# EAGLE board Si4703-Eval-Panel-v13 (EAGLE 6.6.0), part 1 of 2
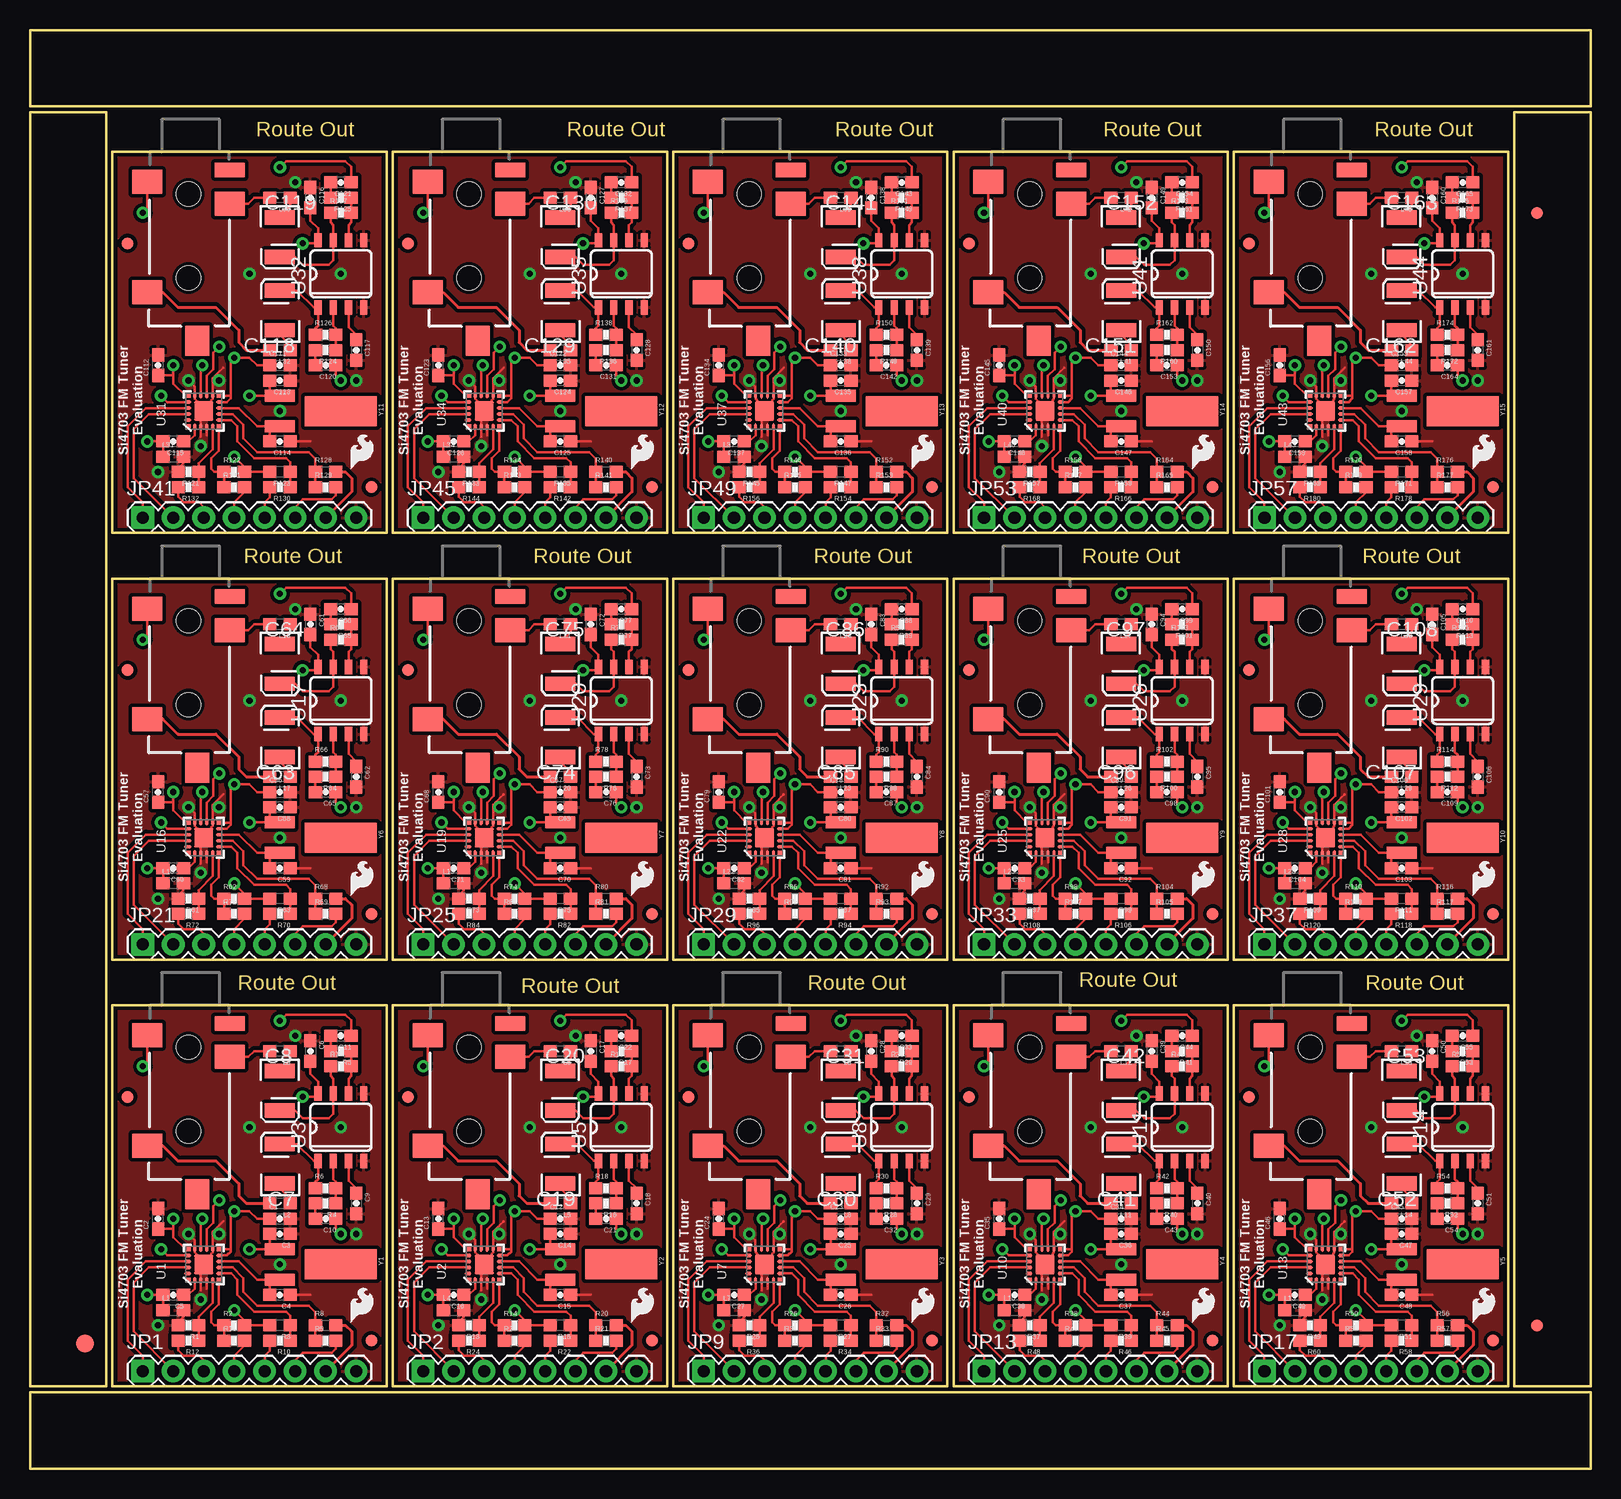
[diagram p0: board, top side]
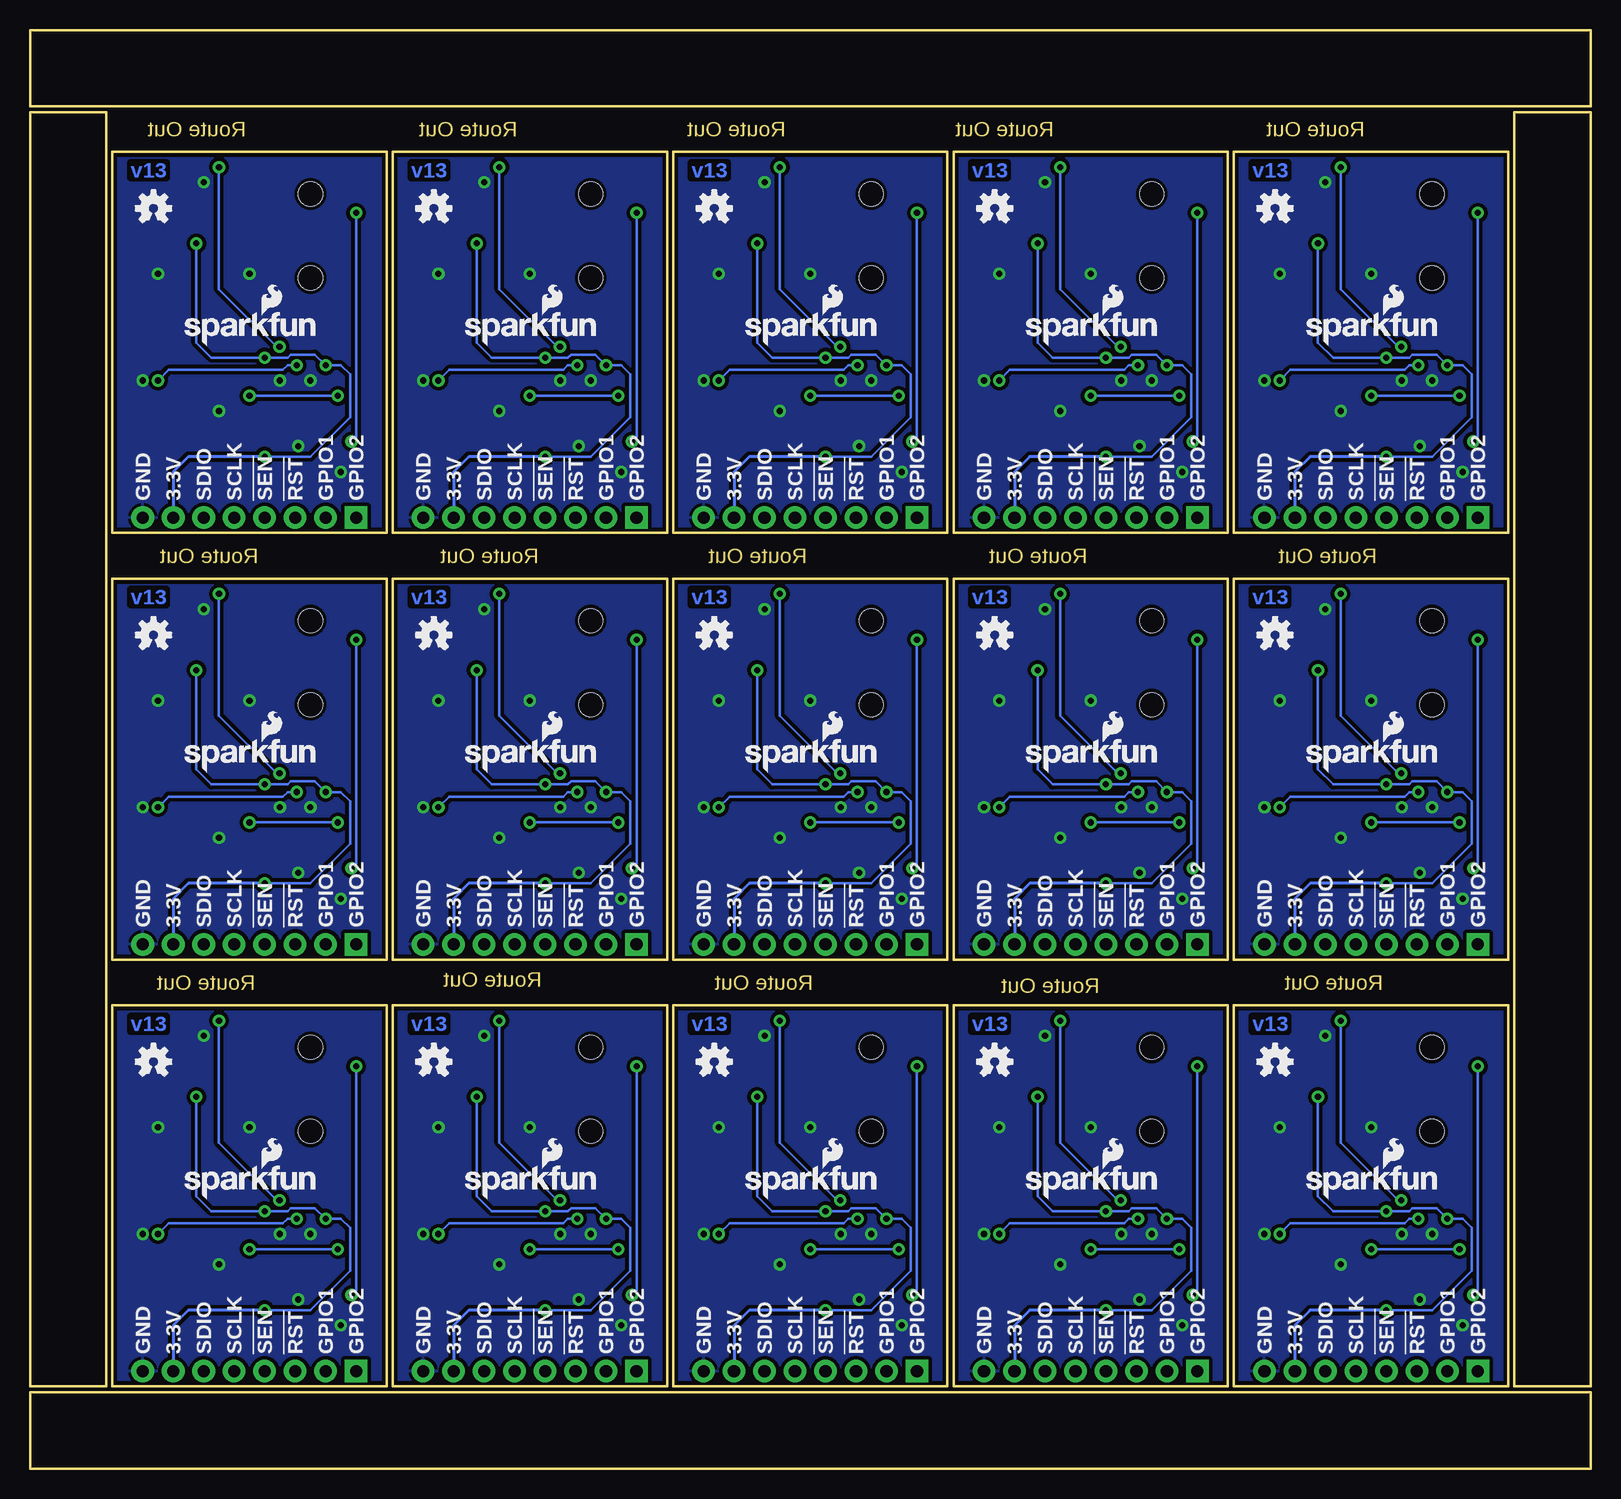
[diagram p1: board, bottom side, seen from below]

Size 130.05 x 119.89 mm. Coordinates in mm from the lower left corner, seen from the top.
Outline: 6.86,6.86 29.72,6.86 29.72,38.61 6.86,38.61 6.86,6.86
Outline: 30.23,6.86 53.09,6.86 53.09,38.61 30.23,38.61 30.23,6.86
Outline: 53.59,6.86 76.45,6.86 76.45,38.61 53.59,38.61 53.59,6.86
Outline: 76.96,6.86 99.82,6.86 99.82,38.61 76.96,38.61 76.96,6.86
Outline: 100.33,6.86 123.19,6.86 123.19,38.61 100.33,38.61 100.33,6.86
Outline: 6.86,42.42 29.72,42.42 29.72,74.17 6.86,74.17 6.86,42.42
Outline: 30.23,42.42 53.09,42.42 53.09,74.17 30.23,74.17 30.23,42.42
Outline: 53.59,42.42 76.45,42.42 76.45,74.17 53.59,74.17 53.59,42.42
Outline: 76.96,42.42 99.82,42.42 99.82,74.17 76.96,74.17 76.96,42.42
Outline: 100.33,42.42 123.19,42.42 123.19,74.17 100.33,74.17 100.33,42.42
Outline: 6.86,77.98 29.72,77.98 29.72,109.73 6.86,109.73 6.86,77.98
Outline: 30.23,77.98 53.09,77.98 53.09,109.73 30.23,109.73 30.23,77.98
Outline: 53.59,77.98 76.45,77.98 76.45,109.73 53.59,109.73 53.59,77.98
Outline: 76.96,77.98 99.82,77.98 99.82,109.73 76.96,109.73 76.96,77.98
Outline: 100.33,77.98 123.19,77.98 123.19,109.73 100.33,109.73 100.33,77.98
Outline: 6.35,6.86 6.35,113.03 0,113.03 0,6.86 6.35,6.86
Outline: 0,0 130.05,0 130.05,6.35 0,6.35 0,0
Outline: 130.05,6.86 130.05,113.03 123.7,113.03 123.7,6.86 130.05,6.86
Outline: 130.05,119.89 0,119.89 0,113.54 130.05,113.54 130.05,119.89
Copper layers (1*16): Top 0.035mm / dielectric 1.5mm / Bottom 0.035mm
Design rules "SparkFun *": minimum track width 8mil, minimum drill 20mil, track to track 8mil, track to pad 8mil, pad to pad 8mil, via to via 8mil, smd to smd 8mil, copper to edge 10mil, drill to drill 8mil, minimum pad ring 12mil, minimum via ring 10mil, stop-mask expansion 4mil, vias tented up to drill 20mil, thermal gap 10mil

## Footprints (pad centres in the part's own frame; a part is rotated, then mirrored left to right if it is on the bottom)
0603-CAP = smd 1.1 x 1: 1 -0.85,0; 2 0.85,0
EIA3528 = smd 1.2 x 2.5: A 1.65,0; C -1.65,0
FIDUCIAL-1.5X3 = smd 1.5 x 1.5: 1 0,0
FIDUCIAL-1X2 = smd 1 x 1: 1 0,0
1X08 = drill 1.016 pad 1.88 square: 1 0,0 | drill 1.016 pad 1.88: 2 2.54,0; 3 5.08,0; 4 7.62,0; 5 10.16,0; 6 12.7,0; 7 15.24,0; 8 17.78,0
0603 = smd 1.1 x 1: 1 -0.85,0; 2 0.85,0
0603-RES = smd 1.1 x 1: 1 -0.85,0; 2 0.85,0
SI470X = smd 0.34 x 0.34: 1 -1.275,1.265; 6 -1.265,-1.265; 11 1.265,-1.265; 16 1.265,1.265 | smd 0.61 x 0.28: 2 -1.335,0.75; 3 -1.335,0.25; 4 -1.335,-0.25; 5 -1.335,-0.75; 12 1.335,-0.75; 13 1.335,-0.25; 14 1.335,0.25; 15 1.335,0.75 | smd 0.28 x 0.61: 7 -0.75,-1.335; 8 -0.25,-1.335; 9 0.25,-1.335; 10 0.75,-1.335; 17 0.75,1.335; 18 0.25,1.335; 19 -0.25,1.335; 20 -0.75,1.335 | smd 1.6 x 1.6: 21 0,0
SO08-TIGHT = smd 0.6 x 1.2: 1 -1.905,-2.8; 2 -0.635,-2.8; 3 0.635,-2.8; 4 1.905,-2.8; 5 1.905,2.8; 6 0.635,2.8; 7 -0.635,2.8; 8 -1.905,2.8
AUDIO-JACK-3.5MM-SMD = smd 2 x 2.5: RING 4.3,3.45; SLEEVE 2.5,-3.45; TIP 11.7,-3.45 | smd 1.2 x 2.5: RSH 1.5,3.45 | smd 2.5 x 2: TSH 15.75,0.75 | hole 2: 3.5,0; 10.5,0
CRYSTAL-32KHZ-SMD = smd 2.5 x 6: SHEILD 0,5.08 | smd 1 x 2.5: X1 -1.27,0; X2 1.27,0

## Placement (x,y rotation side)
C1  0.1uF  [0603-CAP]  20.83,20.83 0 top
C2  22nF  [0603-CAP]  10.67,20.83 90 top
C3  22pF  [0603-CAP]  20.83,19.56 180 top
C4  22pF  [0603-CAP]  20.83,14.48 180 top
C5  1nF  [0603-CAP]  11.94,14.48 180 top
C6  0.1uF  [0603-CAP]  23.37,34.8 270 top
C7  47uF  [EIA3528]  20.83,25.4 90 top
C8  47uF  [EIA3528]  20.83,31.5 270 top
C9  0.1uF  [0603-CAP]  27.18,22.1 270 top
C10  1uF  [0603-CAP]  24.64,20.83 180 top
C11  1uF  [0603-CAP]  25.91,36.07 180 top
C12  0.1uF  [0603-CAP]  44.2,20.83 0 top
C13  22nF  [0603-CAP]  34.04,20.83 90 top
C14  22pF  [0603-CAP]  44.2,19.56 180 top
C15  22pF  [0603-CAP]  44.2,14.48 180 top
C16  1nF  [0603-CAP]  35.31,14.48 180 top
C17  0.1uF  [0603-CAP]  46.74,34.8 270 top
C18  0.1uF  [0603-CAP]  50.55,22.1 270 top
C19  47uF  [EIA3528]  44.2,25.4 90 top
C20  47uF  [EIA3528]  44.2,31.5 270 top
C21  1uF  [0603-CAP]  48.01,20.83 180 top
C22  1uF  [0603-CAP]  49.28,36.07 180 top
C23  0.1uF  [0603-CAP]  67.56,20.83 0 top
C24  22nF  [0603-CAP]  57.4,20.83 90 top
C25  22pF  [0603-CAP]  67.56,19.56 180 top
C26  22pF  [0603-CAP]  67.56,14.48 180 top
C27  1nF  [0603-CAP]  58.67,14.48 180 top
C28  0.1uF  [0603-CAP]  70.1,34.8 270 top
C29  0.1uF  [0603-CAP]  73.91,22.1 270 top
C30  47uF  [EIA3528]  67.56,25.4 90 top
C31  47uF  [EIA3528]  67.56,31.5 270 top
C32  1uF  [0603-CAP]  71.37,20.83 180 top
C33  1uF  [0603-CAP]  72.64,36.07 180 top
C34  0.1uF  [0603-CAP]  90.93,20.83 0 top
C35  22nF  [0603-CAP]  80.77,20.83 90 top
C36  22pF  [0603-CAP]  90.93,19.56 180 top
C37  22pF  [0603-CAP]  90.93,14.48 180 top
C38  1nF  [0603-CAP]  82.04,14.48 180 top
C39  0.1uF  [0603-CAP]  93.47,34.8 270 top
C40  0.1uF  [0603-CAP]  97.28,22.1 270 top
C41  47uF  [EIA3528]  90.93,25.4 90 top
C42  47uF  [EIA3528]  90.93,31.5 270 top
C43  1uF  [0603-CAP]  94.74,20.83 180 top
C44  1uF  [0603-CAP]  96.01,36.07 180 top
C45  0.1uF  [0603-CAP]  114.3,20.83 0 top
C46  22nF  [0603-CAP]  104.14,20.83 90 top
C47  22pF  [0603-CAP]  114.3,19.56 180 top
C48  22pF  [0603-CAP]  114.3,14.48 180 top
C49  1nF  [0603-CAP]  105.41,14.48 180 top
C50  0.1uF  [0603-CAP]  116.84,34.8 270 top
C51  0.1uF  [0603-CAP]  120.65,22.1 270 top
C52  47uF  [EIA3528]  114.3,25.4 90 top
C53  47uF  [EIA3528]  114.3,31.5 270 top
C54  1uF  [0603-CAP]  118.11,20.83 180 top
C55  1uF  [0603-CAP]  119.38,36.07 180 top
C56  0.1uF  [0603-CAP]  20.83,56.39 0 top
C57  22nF  [0603-CAP]  10.67,56.39 90 top
C58  22pF  [0603-CAP]  20.83,55.12 180 top
C59  22pF  [0603-CAP]  20.83,50.04 180 top
C60  1nF  [0603-CAP]  11.94,50.04 180 top
C61  0.1uF  [0603-CAP]  23.37,70.36 270 top
C62  0.1uF  [0603-CAP]  27.18,57.66 270 top
C63  47uF  [EIA3528]  20.83,60.96 90 top
C64  47uF  [EIA3528]  20.83,67.06 270 top
C65  1uF  [0603-CAP]  24.64,56.39 180 top
C66  1uF  [0603-CAP]  25.91,71.63 180 top
C67  0.1uF  [0603-CAP]  44.2,56.39 0 top
C68  22nF  [0603-CAP]  34.04,56.39 90 top
C69  22pF  [0603-CAP]  44.2,55.12 180 top
C70  22pF  [0603-CAP]  44.2,50.04 180 top
C71  1nF  [0603-CAP]  35.31,50.04 180 top
C72  0.1uF  [0603-CAP]  46.74,70.36 270 top
C73  0.1uF  [0603-CAP]  50.55,57.66 270 top
C74  47uF  [EIA3528]  44.2,60.96 90 top
C75  47uF  [EIA3528]  44.2,67.06 270 top
C76  1uF  [0603-CAP]  48.01,56.39 180 top
C77  1uF  [0603-CAP]  49.28,71.63 180 top
C78  0.1uF  [0603-CAP]  67.56,56.39 0 top
C79  22nF  [0603-CAP]  57.4,56.39 90 top
C80  22pF  [0603-CAP]  67.56,55.12 180 top
C81  22pF  [0603-CAP]  67.56,50.04 180 top
C82  1nF  [0603-CAP]  58.67,50.04 180 top
C83  0.1uF  [0603-CAP]  70.1,70.36 270 top
C84  0.1uF  [0603-CAP]  73.91,57.66 270 top
C85  47uF  [EIA3528]  67.56,60.96 90 top
C86  47uF  [EIA3528]  67.56,67.06 270 top
C87  1uF  [0603-CAP]  71.37,56.39 180 top
C88  1uF  [0603-CAP]  72.64,71.63 180 top
C89  0.1uF  [0603-CAP]  90.93,56.39 0 top
C90  22nF  [0603-CAP]  80.77,56.39 90 top
C91  22pF  [0603-CAP]  90.93,55.12 180 top
C92  22pF  [0603-CAP]  90.93,50.04 180 top
C93  1nF  [0603-CAP]  82.04,50.04 180 top
C94  0.1uF  [0603-CAP]  93.47,70.36 270 top
C95  0.1uF  [0603-CAP]  97.28,57.66 270 top
C96  47uF  [EIA3528]  90.93,60.96 90 top
C97  47uF  [EIA3528]  90.93,67.06 270 top
C98  1uF  [0603-CAP]  94.74,56.39 180 top
C99  1uF  [0603-CAP]  96.01,71.63 180 top
C100  0.1uF  [0603-CAP]  114.3,56.39 0 top
C101  22nF  [0603-CAP]  104.14,56.39 90 top
C102  22pF  [0603-CAP]  114.3,55.12 180 top
C103  22pF  [0603-CAP]  114.3,50.04 180 top
C104  1nF  [0603-CAP]  105.41,50.04 180 top
C105  0.1uF  [0603-CAP]  116.84,70.36 270 top
C106  0.1uF  [0603-CAP]  120.65,57.66 270 top
C107  47uF  [EIA3528]  114.3,60.96 90 top
C108  47uF  [EIA3528]  114.3,67.06 270 top
C109  1uF  [0603-CAP]  118.11,56.39 180 top
C110  1uF  [0603-CAP]  119.38,71.63 180 top
C111  0.1uF  [0603-CAP]  20.83,91.95 0 top
C112  22nF  [0603-CAP]  10.67,91.95 90 top
C113  22pF  [0603-CAP]  20.83,90.68 180 top
C114  22pF  [0603-CAP]  20.83,85.6 180 top
C115  1nF  [0603-CAP]  11.94,85.6 180 top
C116  0.1uF  [0603-CAP]  23.37,105.92 270 top
C117  0.1uF  [0603-CAP]  27.18,93.22 270 top
C118  47uF  [EIA3528]  20.83,96.52 90 top
C119  47uF  [EIA3528]  20.83,102.62 270 top
C120  1uF  [0603-CAP]  24.64,91.95 180 top
C121  1uF  [0603-CAP]  25.91,107.19 180 top
C122  0.1uF  [0603-CAP]  44.2,91.95 0 top
C123  22nF  [0603-CAP]  34.04,91.95 90 top
C124  22pF  [0603-CAP]  44.2,90.68 180 top
C125  22pF  [0603-CAP]  44.2,85.6 180 top
C126  1nF  [0603-CAP]  35.31,85.6 180 top
C127  0.1uF  [0603-CAP]  46.74,105.92 270 top
C128  0.1uF  [0603-CAP]  50.55,93.22 270 top
C129  47uF  [EIA3528]  44.2,96.52 90 top
C130  47uF  [EIA3528]  44.2,102.62 270 top
C131  1uF  [0603-CAP]  48.01,91.95 180 top
C132  1uF  [0603-CAP]  49.28,107.19 180 top
C133  0.1uF  [0603-CAP]  67.56,91.95 0 top
C134  22nF  [0603-CAP]  57.4,91.95 90 top
C135  22pF  [0603-CAP]  67.56,90.68 180 top
C136  22pF  [0603-CAP]  67.56,85.6 180 top
C137  1nF  [0603-CAP]  58.67,85.6 180 top
C138  0.1uF  [0603-CAP]  70.1,105.92 270 top
C139  0.1uF  [0603-CAP]  73.91,93.22 270 top
C140  47uF  [EIA3528]  67.56,96.52 90 top
C141  47uF  [EIA3528]  67.56,102.62 270 top
C142  1uF  [0603-CAP]  71.37,91.95 180 top
C143  1uF  [0603-CAP]  72.64,107.19 180 top
C144  0.1uF  [0603-CAP]  90.93,91.95 0 top
C145  22nF  [0603-CAP]  80.77,91.95 90 top
C146  22pF  [0603-CAP]  90.93,90.68 180 top
C147  22pF  [0603-CAP]  90.93,85.6 180 top
C148  1nF  [0603-CAP]  82.04,85.6 180 top
C149  0.1uF  [0603-CAP]  93.47,105.92 270 top
C150  0.1uF  [0603-CAP]  97.28,93.22 270 top
C151  47uF  [EIA3528]  90.93,96.52 90 top
C152  47uF  [EIA3528]  90.93,102.62 270 top
C153  1uF  [0603-CAP]  94.74,91.95 180 top
C154  1uF  [0603-CAP]  96.01,107.19 180 top
C155  0.1uF  [0603-CAP]  114.3,91.95 0 top
C156  22nF  [0603-CAP]  104.14,91.95 90 top
C157  22pF  [0603-CAP]  114.3,90.68 180 top
C158  22pF  [0603-CAP]  114.3,85.6 180 top
C159  1nF  [0603-CAP]  105.41,85.6 180 top
C160  0.1uF  [0603-CAP]  116.84,105.92 270 top
C161  0.1uF  [0603-CAP]  120.65,93.22 270 top
C162  47uF  [EIA3528]  114.3,96.52 90 top
C163  47uF  [EIA3528]  114.3,102.62 270 top
C164  1uF  [0603-CAP]  118.11,91.95 180 top
C165  1uF  [0603-CAP]  119.38,107.19 180 top
E$1  [FIDUCIAL-1.5X3]  4.57,10.41 0 top
E$4  [FIDUCIAL-1X2]  125.6,11.94 0 top
E$5  [FIDUCIAL-1X2]  125.6,104.65 180 top
JP1  [1X08]  9.4,8.13 0 top
JP2  [1X08]  32.77,8.13 0 top
JP3  LOGO-SFESK  [SFE-LOGO-FLAME]  26.75,12.21 0 top
JP4  FIDUCIAL1X2  [FIDUCIAL-1X2]  28.45,10.67 0 top
JP5  FIDUCIAL1X2  [FIDUCIAL-1X2]  8.13,30.99 0 top
JP6  LOGO-SFESK  [SFE-LOGO-FLAME]  50.12,12.21 0 top
JP7  FIDUCIAL1X2  [FIDUCIAL-1X2]  51.82,10.67 0 top
JP8  FIDUCIAL1X2  [FIDUCIAL-1X2]  31.5,30.99 0 top
JP9  [1X08]  56.13,8.13 0 top
JP10  LOGO-SFESK  [SFE-LOGO-FLAME]  73.48,12.21 0 top
JP11  FIDUCIAL1X2  [FIDUCIAL-1X2]  75.18,10.67 0 top
JP12  FIDUCIAL1X2  [FIDUCIAL-1X2]  54.86,30.99 0 top
JP13  [1X08]  79.5,8.13 0 top
JP14  LOGO-SFESK  [SFE-LOGO-FLAME]  96.85,12.21 0 top
JP15  FIDUCIAL1X2  [FIDUCIAL-1X2]  98.55,10.67 0 top
JP16  FIDUCIAL1X2  [FIDUCIAL-1X2]  78.23,30.99 0 top
JP17  [1X08]  102.87,8.13 0 top
JP18  LOGO-SFESK  [SFE-LOGO-FLAME]  120.22,12.21 0 top
JP19  FIDUCIAL1X2  [FIDUCIAL-1X2]  121.92,10.67 0 top
JP20  FIDUCIAL1X2  [FIDUCIAL-1X2]  101.6,30.99 0 top
JP21  [1X08]  9.4,43.69 0 top
JP22  LOGO-SFESK  [SFE-LOGO-FLAME]  26.75,47.77 0 top
JP23  FIDUCIAL1X2  [FIDUCIAL-1X2]  28.45,46.23 0 top
JP24  FIDUCIAL1X2  [FIDUCIAL-1X2]  8.13,66.55 0 top
JP25  [1X08]  32.77,43.69 0 top
JP26  LOGO-SFESK  [SFE-LOGO-FLAME]  50.12,47.77 0 top
JP27  FIDUCIAL1X2  [FIDUCIAL-1X2]  51.82,46.23 0 top
JP28  FIDUCIAL1X2  [FIDUCIAL-1X2]  31.5,66.55 0 top
JP29  [1X08]  56.13,43.69 0 top
JP30  LOGO-SFESK  [SFE-LOGO-FLAME]  73.48,47.77 0 top
JP31  FIDUCIAL1X2  [FIDUCIAL-1X2]  75.18,46.23 0 top
JP32  FIDUCIAL1X2  [FIDUCIAL-1X2]  54.86,66.55 0 top
JP33  [1X08]  79.5,43.69 0 top
JP34  LOGO-SFESK  [SFE-LOGO-FLAME]  96.85,47.77 0 top
JP35  FIDUCIAL1X2  [FIDUCIAL-1X2]  98.55,46.23 0 top
JP36  FIDUCIAL1X2  [FIDUCIAL-1X2]  78.23,66.55 0 top
JP37  [1X08]  102.87,43.69 0 top
JP38  LOGO-SFESK  [SFE-LOGO-FLAME]  120.22,47.77 0 top
JP39  FIDUCIAL1X2  [FIDUCIAL-1X2]  121.92,46.23 0 top
JP40  FIDUCIAL1X2  [FIDUCIAL-1X2]  101.6,66.55 0 top
JP41  [1X08]  9.4,79.25 0 top
JP42  LOGO-SFESK  [SFE-LOGO-FLAME]  26.75,83.33 0 top
JP43  FIDUCIAL1X2  [FIDUCIAL-1X2]  28.45,81.79 0 top
JP44  FIDUCIAL1X2  [FIDUCIAL-1X2]  8.13,102.11 0 top
JP45  [1X08]  32.77,79.25 0 top
JP46  LOGO-SFESK  [SFE-LOGO-FLAME]  50.12,83.33 0 top
JP47  FIDUCIAL1X2  [FIDUCIAL-1X2]  51.82,81.79 0 top
JP48  FIDUCIAL1X2  [FIDUCIAL-1X2]  31.5,102.11 0 top
JP49  [1X08]  56.13,79.25 0 top
JP50  LOGO-SFESK  [SFE-LOGO-FLAME]  73.48,83.33 0 top
JP51  FIDUCIAL1X2  [FIDUCIAL-1X2]  75.18,81.79 0 top
JP52  FIDUCIAL1X2  [FIDUCIAL-1X2]  54.86,102.11 0 top
JP53  [1X08]  79.5,79.25 0 top
JP54  LOGO-SFESK  [SFE-LOGO-FLAME]  96.85,83.33 0 top
JP55  FIDUCIAL1X2  [FIDUCIAL-1X2]  98.55,81.79 0 top
JP56  FIDUCIAL1X2  [FIDUCIAL-1X2]  78.23,102.11 0 top
JP57  [1X08]  102.87,79.25 0 top
JP58  LOGO-SFESK  [SFE-LOGO-FLAME]  120.22,83.33 0 top
JP59  FIDUCIAL1X2  [FIDUCIAL-1X2]  121.92,81.79 0 top
JP60  FIDUCIAL1X2  [FIDUCIAL-1X2]  101.6,102.11 0 top
L1  270nH  [0603]  11.94,13.21 0 top
L2  Ferrite 2.5k  [0603]  20.83,22.1 180 top
L3  Ferrite 2.5k  [0603]  20.83,34.8 180 top
L4  270nH  [0603]  35.31,13.21 0 top
L5  Ferrite 2.5k  [0603]  44.2,22.1 180 top
L6  Ferrite 2.5k  [0603]  44.2,34.8 180 top
L7  270nH  [0603]  58.67,13.21 0 top
L8  Ferrite 2.5k  [0603]  67.56,22.1 180 top
L9  Ferrite 2.5k  [0603]  67.56,34.8 180 top
L10  270nH  [0603]  82.04,13.21 0 top
L11  Ferrite 2.5k  [0603]  90.93,22.1 180 top
L12  Ferrite 2.5k  [0603]  90.93,34.8 180 top
L13  270nH  [0603]  105.41,13.21 0 top
L14  Ferrite 2.5k  [0603]  114.3,22.1 180 top
L15  Ferrite 2.5k  [0603]  114.3,34.8 180 top
L16  270nH  [0603]  11.94,48.77 0 top
L17  Ferrite 2.5k  [0603]  20.83,57.66 180 top
L18  Ferrite 2.5k  [0603]  20.83,70.36 180 top
L19  270nH  [0603]  35.31,48.77 0 top
L20  Ferrite 2.5k  [0603]  44.2,57.66 180 top
L21  Ferrite 2.5k  [0603]  44.2,70.36 180 top
L22  270nH  [0603]  58.67,48.77 0 top
L23  Ferrite 2.5k  [0603]  67.56,57.66 180 top
L24  Ferrite 2.5k  [0603]  67.56,70.36 180 top
L25  270nH  [0603]  82.04,48.77 0 top
L26  Ferrite 2.5k  [0603]  90.93,57.66 180 top
L27  Ferrite 2.5k  [0603]  90.93,70.36 180 top
L28  270nH  [0603]  105.41,48.77 0 top
L29  Ferrite 2.5k  [0603]  114.3,57.66 180 top
L30  Ferrite 2.5k  [0603]  114.3,70.36 180 top
L31  270nH  [0603]  11.94,84.33 0 top
L32  Ferrite 2.5k  [0603]  20.83,93.22 180 top
L33  Ferrite 2.5k  [0603]  20.83,105.92 180 top
L34  270nH  [0603]  35.31,84.33 0 top
L35  Ferrite 2.5k  [0603]  44.2,93.22 180 top
L36  Ferrite 2.5k  [0603]  44.2,105.92 180 top
L37  270nH  [0603]  58.67,84.33 0 top
L38  Ferrite 2.5k  [0603]  67.56,93.22 180 top
L39  Ferrite 2.5k  [0603]  67.56,105.92 180 top
L40  270nH  [0603]  82.04,84.33 0 top
L41  Ferrite 2.5k  [0603]  90.93,93.22 180 top
L42  Ferrite 2.5k  [0603]  90.93,105.92 180 top
L43  270nH  [0603]  105.41,84.33 0 top
L44  Ferrite 2.5k  [0603]  114.3,93.22 180 top
L45  Ferrite 2.5k  [0603]  114.3,105.92 180 top
LOGO1  SFE_LOGO_NAME_FLAME.1_INCH  [SFE_LOGO_NAME_FLAME_.1]  24.13,22.35 0 bottom
LOGO2  OSHW-LOGOS  [OSHW-LOGO-S]  26.29,33.91 0 bottom
LOGO3  SFE_LOGO_NAME_FLAME.1_INCH  [SFE_LOGO_NAME_FLAME_.1]  47.5,22.35 0 bottom
LOGO4  OSHW-LOGOS  [OSHW-LOGO-S]  49.66,33.91 0 bottom
LOGO5  SFE_LOGO_NAME_FLAME.1_INCH  [SFE_LOGO_NAME_FLAME_.1]  70.87,22.35 0 bottom
LOGO6  OSHW-LOGOS  [OSHW-LOGO-S]  73.03,33.91 0 bottom
LOGO7  SFE_LOGO_NAME_FLAME.1_INCH  [SFE_LOGO_NAME_FLAME_.1]  94.23,22.35 0 bottom
LOGO8  OSHW-LOGOS  [OSHW-LOGO-S]  96.39,33.91 0 bottom
LOGO9  SFE_LOGO_NAME_FLAME.1_INCH  [SFE_LOGO_NAME_FLAME_.1]  117.6,22.35 0 bottom
LOGO10  OSHW-LOGOS  [OSHW-LOGO-S]  119.76,33.91 0 bottom
LOGO11  SFE_LOGO_NAME_FLAME.1_INCH  [SFE_LOGO_NAME_FLAME_.1]  24.13,57.91 0 bottom
LOGO12  OSHW-LOGOS  [OSHW-LOGO-S]  26.29,69.47 0 bottom
LOGO13  SFE_LOGO_NAME_FLAME.1_INCH  [SFE_LOGO_NAME_FLAME_.1]  47.5,57.91 0 bottom
LOGO14  OSHW-LOGOS  [OSHW-LOGO-S]  49.66,69.47 0 bottom
LOGO15  SFE_LOGO_NAME_FLAME.1_INCH  [SFE_LOGO_NAME_FLAME_.1]  70.87,57.91 0 bottom
LOGO16  OSHW-LOGOS  [OSHW-LOGO-S]  73.03,69.47 0 bottom
LOGO17  SFE_LOGO_NAME_FLAME.1_INCH  [SFE_LOGO_NAME_FLAME_.1]  94.23,57.91 0 bottom
LOGO18  OSHW-LOGOS  [OSHW-LOGO-S]  96.39,69.47 0 bottom
LOGO19  SFE_LOGO_NAME_FLAME.1_INCH  [SFE_LOGO_NAME_FLAME_.1]  117.6,57.91 0 bottom
LOGO20  OSHW-LOGOS  [OSHW-LOGO-S]  119.76,69.47 0 bottom
LOGO21  SFE_LOGO_NAME_FLAME.1_INCH  [SFE_LOGO_NAME_FLAME_.1]  24.13,93.47 0 bottom
LOGO22  OSHW-LOGOS  [OSHW-LOGO-S]  26.29,105.03 0 bottom
LOGO23  SFE_LOGO_NAME_FLAME.1_INCH  [SFE_LOGO_NAME_FLAME_.1]  47.5,93.47 0 bottom
LOGO24  OSHW-LOGOS  [OSHW-LOGO-S]  49.66,105.03 0 bottom
LOGO25  SFE_LOGO_NAME_FLAME.1_INCH  [SFE_LOGO_NAME_FLAME_.1]  70.87,93.47 0 bottom
LOGO26  OSHW-LOGOS  [OSHW-LOGO-S]  73.03,105.03 0 bottom
LOGO27  SFE_LOGO_NAME_FLAME.1_INCH  [SFE_LOGO_NAME_FLAME_.1]  94.23,93.47 0 bottom
LOGO28  OSHW-LOGOS  [OSHW-LOGO-S]  96.39,105.03 0 bottom
LOGO29  SFE_LOGO_NAME_FLAME.1_INCH  [SFE_LOGO_NAME_FLAME_.1]  117.6,93.47 0 bottom
LOGO30  OSHW-LOGOS  [OSHW-LOGO-S]  119.76,105.03 0 bottom
R1  10k  [0603-RES]  13.21,11.94 180 top
R2  10k  [0603-RES]  17.02,11.94 0 top
R3  4.7k  [0603]  20.83,11.94 180 top
R4  20k  [0603-RES]  24.64,22.1 180 top
R5  20k  [0603-RES]  25.91,34.8 180 top
R6  20k  [0603-RES]  24.64,23.37 0 top
R7  20k  [0603-RES]  25.91,33.53 0 top
R8  4.7k  [0603]  24.64,11.94 0 top
R9  330  [0603-RES]  24.64,10.67 0 top
R10  330  [0603-RES]  20.83,10.67 180 top
R11  330  [0603-RES]  17.02,10.67 0 top
R12  330  [0603-RES]  13.21,10.67 180 top
R13  10k  [0603-RES]  36.58,11.94 180 top
R14  10k  [0603-RES]  40.39,11.94 0 top
R15  4.7k  [0603]  44.2,11.94 180 top
R16  20k  [0603-RES]  48.01,22.1 180 top
R17  20k  [0603-RES]  49.28,34.8 180 top
R18  20k  [0603-RES]  48.01,23.37 0 top
R19  20k  [0603-RES]  49.28,33.53 0 top
R20  4.7k  [0603]  48.01,11.94 0 top
R21  330  [0603-RES]  48.01,10.67 0 top
R22  330  [0603-RES]  44.2,10.67 180 top
R23  330  [0603-RES]  40.39,10.67 0 top
R24  330  [0603-RES]  36.58,10.67 180 top
R25  10k  [0603-RES]  59.94,11.94 180 top
R26  10k  [0603-RES]  63.75,11.94 0 top
R27  4.7k  [0603]  67.56,11.94 180 top
R28  20k  [0603-RES]  71.37,22.1 180 top
R29  20k  [0603-RES]  72.64,34.8 180 top
R30  20k  [0603-RES]  71.37,23.37 0 top
R31  20k  [0603-RES]  72.64,33.53 0 top
R32  4.7k  [0603]  71.37,11.94 0 top
R33  330  [0603-RES]  71.37,10.67 0 top
R34  330  [0603-RES]  67.56,10.67 180 top
R35  330  [0603-RES]  63.75,10.67 0 top
R36  330  [0603-RES]  59.94,10.67 180 top
R37  10k  [0603-RES]  83.31,11.94 180 top
R38  10k  [0603-RES]  87.12,11.94 0 top
R39  4.7k  [0603]  90.93,11.94 180 top
R40  20k  [0603-RES]  94.74,22.1 180 top
R41  20k  [0603-RES]  96.01,34.8 180 top
R42  20k  [0603-RES]  94.74,23.37 0 top
R43  20k  [0603-RES]  96.01,33.53 0 top
R44  4.7k  [0603]  94.74,11.94 0 top
R45  330  [0603-RES]  94.74,10.67 0 top
R46  330  [0603-RES]  90.93,10.67 180 top
R47  330  [0603-RES]  87.12,10.67 0 top
R48  330  [0603-RES]  83.31,10.67 180 top
R49  10k  [0603-RES]  106.68,11.94 180 top
R50  10k  [0603-RES]  110.49,11.94 0 top
R51  4.7k  [0603]  114.3,11.94 180 top
R52  20k  [0603-RES]  118.11,22.1 180 top
R53  20k  [0603-RES]  119.38,34.8 180 top
R54  20k  [0603-RES]  118.11,23.37 0 top
R55  20k  [0603-RES]  119.38,33.53 0 top
R56  4.7k  [0603]  118.11,11.94 0 top
R57  330  [0603-RES]  118.11,10.67 0 top
R58  330  [0603-RES]  114.3,10.67 180 top
R59  330  [0603-RES]  110.49,10.67 0 top
R60  330  [0603-RES]  106.68,10.67 180 top
R61  10k  [0603-RES]  13.21,47.5 180 top
R62  10k  [0603-RES]  17.02,47.5 0 top
R63  4.7k  [0603]  20.83,47.5 180 top
R64  20k  [0603-RES]  24.64,57.66 180 top
R65  20k  [0603-RES]  25.91,70.36 180 top
R66  20k  [0603-RES]  24.64,58.93 0 top
R67  20k  [0603-RES]  25.91,69.09 0 top
R68  4.7k  [0603]  24.64,47.5 0 top
R69  330  [0603-RES]  24.64,46.23 0 top
R70  330  [0603-RES]  20.83,46.23 180 top
R71  330  [0603-RES]  17.02,46.23 0 top
R72  330  [0603-RES]  13.21,46.23 180 top
R73  10k  [0603-RES]  36.58,47.5 180 top
R74  10k  [0603-RES]  40.39,47.5 0 top
R75  4.7k  [0603]  44.2,47.5 180 top
R76  20k  [0603-RES]  48.01,57.66 180 top
R77  20k  [0603-RES]  49.28,70.36 180 top
R78  20k  [0603-RES]  48.01,58.93 0 top
R79  20k  [0603-RES]  49.28,69.09 0 top
R80  4.7k  [0603]  48.01,47.5 0 top
R81  330  [0603-RES]  48.01,46.23 0 top
R82  330  [0603-RES]  44.2,46.23 180 top
R83  330  [0603-RES]  40.39,46.23 0 top
R84  330  [0603-RES]  36.58,46.23 180 top
R85  10k  [0603-RES]  59.94,47.5 180 top
R86  10k  [0603-RES]  63.75,47.5 0 top
R87  4.7k  [0603]  67.56,47.5 180 top
R88  20k  [0603-RES]  71.37,57.66 180 top
R89  20k  [0603-RES]  72.64,70.36 180 top
R90  20k  [0603-RES]  71.37,58.93 0 top
R91  20k  [0603-RES]  72.64,69.09 0 top
R92  4.7k  [0603]  71.37,47.5 0 top
R93  330  [0603-RES]  71.37,46.23 0 top
R94  330  [0603-RES]  67.56,46.23 180 top
R95  330  [0603-RES]  63.75,46.23 0 top
R96  330  [0603-RES]  59.94,46.23 180 top
R97  10k  [0603-RES]  83.31,47.5 180 top
R98  10k  [0603-RES]  87.12,47.5 0 top
R99  4.7k  [0603]  90.93,47.5 180 top
R100  20k  [0603-RES]  94.74,57.66 180 top
R101  20k  [0603-RES]  96.01,70.36 180 top
R102  20k  [0603-RES]  94.74,58.93 0 top
R103  20k  [0603-RES]  96.01,69.09 0 top
R104  4.7k  [0603]  94.74,47.5 0 top
R105  330  [0603-RES]  94.74,46.23 0 top
R106  330  [0603-RES]  90.93,46.23 180 top
R107  330  [0603-RES]  87.12,46.23 0 top
R108  330  [0603-RES]  83.31,46.23 180 top
R109  10k  [0603-RES]  106.68,47.5 180 top
R110  10k  [0603-RES]  110.49,47.5 0 top
R111  4.7k  [0603]  114.3,47.5 180 top
R112  20k  [0603-RES]  118.11,57.66 180 top
R113  20k  [0603-RES]  119.38,70.36 180 top
R114  20k  [0603-RES]  118.11,58.93 0 top
R115  20k  [0603-RES]  119.38,69.09 0 top
R116  4.7k  [0603]  118.11,47.5 0 top
R117  330  [0603-RES]  118.11,46.23 0 top
R118  330  [0603-RES]  114.3,46.23 180 top
R119  330  [0603-RES]  110.49,46.23 0 top
R120  330  [0603-RES]  106.68,46.23 180 top
R121  10k  [0603-RES]  13.21,83.06 180 top
R122  10k  [0603-RES]  17.02,83.06 0 top
R123  4.7k  [0603]  20.83,83.06 180 top
R124  20k  [0603-RES]  24.64,93.22 180 top
R125  20k  [0603-RES]  25.91,105.92 180 top
R126  20k  [0603-RES]  24.64,94.49 0 top
R127  20k  [0603-RES]  25.91,104.65 0 top
R128  4.7k  [0603]  24.64,83.06 0 top
R129  330  [0603-RES]  24.64,81.79 0 top
R130  330  [0603-RES]  20.83,81.79 180 top
R131  330  [0603-RES]  17.02,81.79 0 top
R132  330  [0603-RES]  13.21,81.79 180 top
R133  10k  [0603-RES]  36.58,83.06 180 top
R134  10k  [0603-RES]  40.39,83.06 0 top
R135  4.7k  [0603]  44.2,83.06 180 top
R136  20k  [0603-RES]  48.01,93.22 180 top
R137  20k  [0603-RES]  49.28,105.92 180 top
R138  20k  [0603-RES]  48.01,94.49 0 top
R139  20k  [0603-RES]  49.28,104.65 0 top
R140  4.7k  [0603]  48.01,83.06 0 top
R141  330  [0603-RES]  48.01,81.79 0 top
R142  330  [0603-RES]  44.2,81.79 180 top
R143  330  [0603-RES]  40.39,81.79 0 top
R144  330  [0603-RES]  36.58,81.79 180 top
R145  10k  [0603-RES]  59.94,83.06 180 top
R146  10k  [0603-RES]  63.75,83.06 0 top
R147  4.7k  [0603]  67.56,83.06 180 top
R148  20k  [0603-RES]  71.37,93.22 180 top
R149  20k  [0603-RES]  72.64,105.92 180 top
R150  20k  [0603-RES]  71.37,94.49 0 top
R151  20k  [0603-RES]  72.64,104.65 0 top
R152  4.7k  [0603]  71.37,83.06 0 top
R153  330  [0603-RES]  71.37,81.79 0 top
R154  330  [0603-RES]  67.56,81.79 180 top
R155  330  [0603-RES]  63.75,81.79 0 top
R156  330  [0603-RES]  59.94,81.79 180 top
R157  10k  [0603-RES]  83.31,83.06 180 top
R158  10k  [0603-RES]  87.12,83.06 0 top
R159  4.7k  [0603]  90.93,83.06 180 top
R160  20k  [0603-RES]  94.74,93.22 180 top
R161  20k  [0603-RES]  96.01,105.92 180 top
R162  20k  [0603-RES]  94.74,94.49 0 top
R163  20k  [0603-RES]  96.01,104.65 0 top
R164  4.7k  [0603]  94.74,83.06 0 top
R165  330  [0603-RES]  94.74,81.79 0 top
R166  330  [0603-RES]  90.93,81.79 180 top
R167  330  [0603-RES]  87.12,81.79 0 top
R168  330  [0603-RES]  83.31,81.79 180 top
R169  10k  [0603-RES]  106.68,83.06 180 top
R170  10k  [0603-RES]  110.49,83.06 0 top
R171  4.7k  [0603]  114.3,83.06 180 top
R172  20k  [0603-RES]  118.11,93.22 180 top
R173  20k  [0603-RES]  119.38,105.92 180 top
R174  20k  [0603-RES]  118.11,94.49 0 top
R175  20k  [0603-RES]  119.38,104.65 0 top
R176  4.7k  [0603]  118.11,83.06 0 top
R177  330  [0603-RES]  118.11,81.79 0 top
R178  330  [0603-RES]  114.3,81.79 180 top
R179  330  [0603-RES]  110.49,81.79 0 top
R180  330  [0603-RES]  106.68,81.79 180 top
U1  SI4703  [SI470X]  14.48,17.02 90 top
U2  SI4703  [SI470X]  37.85,17.02 90 top
U3  TPA6111  [SO08-TIGHT]  25.91,28.45 0 top
U4  [AUDIO-JACK-3.5MM-SMD]  13.21,38.61 270 top
U5  TPA6111  [SO08-TIGHT]  49.28,28.45 0 top
U6  [AUDIO-JACK-3.5MM-SMD]  36.58,38.61 270 top
U7  SI4703  [SI470X]  61.21,17.02 90 top
U8  TPA6111  [SO08-TIGHT]  72.64,28.45 0 top
U9  [AUDIO-JACK-3.5MM-SMD]  59.94,38.61 270 top
U10  SI4703  [SI470X]  84.58,17.02 90 top
U11  TPA6111  [SO08-TIGHT]  96.01,28.45 0 top
U12  [AUDIO-JACK-3.5MM-SMD]  83.31,38.61 270 top
U13  SI4703  [SI470X]  107.95,17.02 90 top
U14  TPA6111  [SO08-TIGHT]  119.38,28.45 0 top
U15  [AUDIO-JACK-3.5MM-SMD]  106.68,38.61 270 top
U16  SI4703  [SI470X]  14.48,52.58 90 top
U17  TPA6111  [SO08-TIGHT]  25.91,64.01 0 top
U18  [AUDIO-JACK-3.5MM-SMD]  13.21,74.17 270 top
U19  SI4703  [SI470X]  37.85,52.58 90 top
U20  TPA6111  [SO08-TIGHT]  49.28,64.01 0 top
U21  [AUDIO-JACK-3.5MM-SMD]  36.58,74.17 270 top
U22  SI4703  [SI470X]  61.21,52.58 90 top
U23  TPA6111  [SO08-TIGHT]  72.64,64.01 0 top
U24  [AUDIO-JACK-3.5MM-SMD]  59.94,74.17 270 top
U25  SI4703  [SI470X]  84.58,52.58 90 top
U26  TPA6111  [SO08-TIGHT]  96.01,64.01 0 top
U27  [AUDIO-JACK-3.5MM-SMD]  83.31,74.17 270 top
U28  SI4703  [SI470X]  107.95,52.58 90 top
U29  TPA6111  [SO08-TIGHT]  119.38,64.01 0 top
U30  [AUDIO-JACK-3.5MM-SMD]  106.68,74.17 270 top
U31  SI4703  [SI470X]  14.48,88.14 90 top
U32  TPA6111  [SO08-TIGHT]  25.91,99.57 0 top
U33  [AUDIO-JACK-3.5MM-SMD]  13.21,109.73 270 top
U34  SI4703  [SI470X]  37.85,88.14 90 top
U35  TPA6111  [SO08-TIGHT]  49.28,99.57 0 top
U36  [AUDIO-JACK-3.5MM-SMD]  36.58,109.73 270 top
U37  SI4703  [SI470X]  61.21,88.14 90 top
U38  TPA6111  [SO08-TIGHT]  72.64,99.57 0 top
U39  [AUDIO-JACK-3.5MM-SMD]  59.94,109.73 270 top
U40  SI4703  [SI470X]  84.58,88.14 90 top
U41  TPA6111  [SO08-TIGHT]  96.01,99.57 0 top
U42  [AUDIO-JACK-3.5MM-SMD]  83.31,109.73 270 top
U43  SI4703  [SI470X]  107.95,88.14 90 top
U44  TPA6111  [SO08-TIGHT]  119.38,99.57 0 top
U45  [AUDIO-JACK-3.5MM-SMD]  106.68,109.73 270 top
Y1  32.768kHz  [CRYSTAL-32KHZ-SMD]  20.83,17.02 270 top
Y2  32.768kHz  [CRYSTAL-32KHZ-SMD]  44.2,17.02 270 top
Y3  32.768kHz  [CRYSTAL-32KHZ-SMD]  67.56,17.02 270 top
Y4  32.768kHz  [CRYSTAL-32KHZ-SMD]  90.93,17.02 270 top
Y5  32.768kHz  [CRYSTAL-32KHZ-SMD]  114.3,17.02 270 top
Y6  32.768kHz  [CRYSTAL-32KHZ-SMD]  20.83,52.58 270 top
Y7  32.768kHz  [CRYSTAL-32KHZ-SMD]  44.2,52.58 270 top
Y8  32.768kHz  [CRYSTAL-32KHZ-SMD]  67.56,52.58 270 top
Y9  32.768kHz  [CRYSTAL-32KHZ-SMD]  90.93,52.58 270 top
Y10  32.768kHz  [CRYSTAL-32KHZ-SMD]  114.3,52.58 270 top
Y11  32.768kHz  [CRYSTAL-32KHZ-SMD]  20.83,88.14 270 top
Y12  32.768kHz  [CRYSTAL-32KHZ-SMD]  44.2,88.14 270 top
Y13  32.768kHz  [CRYSTAL-32KHZ-SMD]  67.56,88.14 270 top
Y14  32.768kHz  [CRYSTAL-32KHZ-SMD]  90.93,88.14 270 top
Y15  32.768kHz  [CRYSTAL-32KHZ-SMD]  114.3,88.14 270 top

## Library data of the parts
C1 C6 C9 C12 C17 C18 C23 C28 C29 C34 C39 C40 C45 C50 C51 C56 C61 C62 C67 C72 C73 C78 C83 C84 C89 C94 C95 C100 C105 C106 C111 C116 C117 C122 C127 C128 C133 C138 C139 C144 C149 C150 C155 C160 C161 = SparkFun-Capacitors; PROD_ID: CAP-00810
C2 C13 C24 C35 C46 C57 C68 C79 C90 C101 C112 C123 C134 C145 C156 = SparkFun-Capacitors; PROD_ID: CAP-07885
C3 C4 C14 C15 C25 C26 C36 C37 C47 C48 C58 C59 C69 C70 C80 C81 C91 C92 C102 C103 C113 C114 C124 C125 C135 C136 C146 C147 C157 C158 = SparkFun-Capacitors; PROD_ID: CAP-07876
C5 C16 C27 C38 C49 C60 C71 C82 C93 C104 C115 C126 C137 C148 C159 = SparkFun-Capacitors; PROD_ID: CAP-07886
C7 C8 C19 C20 C30 C31 C41 C42 C52 C53 C63 C64 C74 C75 C85 C86 C96 C97 C107 C108 C118 C119 C129 C130 C140 C141 C151 C152 C162 C163 = SparkFun-Capacitors; PROD_ID: CAP-08310
C10 C11 C21 C22 C32 C33 C43 C44 C54 C55 C65 C66 C76 C77 C87 C88 C98 C99 C109 C110 C120 C121 C131 C132 C142 C143 C153 C154 C164 C165 = SparkFun-Capacitors; PROD_ID: CAP-00868
E$1 = SparkFun-Retired
E$4 E$5 LOGO1-LOGO30 = SparkFun-Aesthetics
JP1-JP60 = SparkFun
L1-L45 = SparkFun-Passives
R1 R2 R13 R14 R25 R26 R37 R38 R49 R50 R61 R62 R73 R74 R85 R86 R97 R98 R109 R110 R121 R122 R133 R134 R145 R146 R157 R158 R169 R170 = SparkFun-Resistors; PROD_ID: RES-00824
R3 R8 R15 R20 R27 R32 R39 R44 R51 R56 R63 R68 R75 R80 R87 R92 R99 R104 R111 R116 R123 R128 R135 R140 R147 R152 R159 R164 R171 R176 = SparkFun-Resistors; PROD_ID: RES-07857
R4-R7 R16-R19 R28-R31 R40-R43 R52-R55 R64-R67 R76-R79 R88-R91 R100-R103 R112-R115 R124-R127 R136-R139 R148-R151 R160-R163 R172-R175 = SparkFun-Resistors; PROD_ID: RES-09383
R9-R12 R21-R24 R33-R36 R45-R48 R57-R60 R69-R72 R81-R84 R93-R96 R105-R108 R117-R120 R129-R132 R141-R144 R153-R156 R165-R168 R177-R180 = SparkFun-Resistors; PROD_ID: RES-00818
U1 U2 U7 U10 U13 U16 U19 U22 U25 U28 U31 U34 U37 U40 U43 = SparkFun-RF
U3 U5 U8 U11 U14 U17 U20 U23 U26 U29 U32 U35 U38 U41 U44 = SparkFun-AnalogIC; PROD_ID: IC-10149
U4 U6 U9 U12 U15 U18 U21 U24 U27 U30 U33 U36 U39 U42 U45 = SparkFun-Connectors
Y1-Y15 = SparkFun-FreqCtrl; PROD_ID: XTAL-07894

## Nets
3.3V: C1.1 C2.1 C6.2 JP1.7 R2.2 R3.2 R8.2 U1.10 U1.11 U1.16 U3.8
3.3V1: C12.1 C13.1 C17.2 JP2.7 R14.2 R15.2 R20.2 U2.10 U2.11 U2.16 U5.8
3.3V2: C23.1 C24.1 C28.2 JP9.7 R26.2 R27.2 R32.2 U7.10 U7.11 U7.16 U8.8
3.3V3: C34.1 C35.1 C39.2 JP13.7 R38.2 R39.2 R44.2 U10.10 U10.11 U10.16 U11.8
3.3V4: C45.1 C46.1 C50.2 JP17.7 R50.2 R51.2 R56.2 U13.10 U13.11 U13.16 U14.8
3.3V5: C56.1 C57.1 C61.2 JP21.7 R62.2 R63.2 R68.2 U16.10 U16.11 U16.16 U17.8
3.3V6: C67.1 C68.1 C72.2 JP25.7 R74.2 R75.2 R80.2 U19.10 U19.11 U19.16 U20.8
3.3V7: C78.1 C79.1 C83.2 JP29.7 R86.2 R87.2 R92.2 U22.10 U22.11 U22.16 U23.8
3.3V8: C89.1 C90.1 C94.2 JP33.7 R98.2 R99.2 R104.2 U25.10 U25.11 U25.16 U26.8
3.3V9: C100.1 C101.1 C105.2 JP37.7 R110.2 R111.2 R116.2 U28.10 U28.11 U28.16 U29.8
3.3V10: C111.1 C112.1 C116.2 JP41.7 R122.2 R123.2 R128.2 U31.10 U31.11 U31.16 U32.8
3.3V11: C122.1 C123.1 C127.2 JP45.7 R134.2 R135.2 R140.2 U34.10 U34.11 U34.16 U35.8
3.3V12: C133.1 C134.1 C138.2 JP49.7 R146.2 R147.2 R152.2 U37.10 U37.11 U37.16 U38.8
3.3V13: C144.1 C145.1 C149.2 JP53.7 R158.2 R159.2 R164.2 U40.10 U40.11 U40.16 U41.8
3.3V14: C155.1 C156.1 C160.2 JP57.7 R170.2 R171.2 R176.2 U43.10 U43.11 U43.16 U44.8
!RST: JP1.3 R12.2
!RST1: JP2.3 R24.2
!RST2: JP9.3 R36.2
!RST3: JP13.3 R48.2
!RST4: JP17.3 R60.2
!RST5: JP21.3 R72.2
!RST6: JP25.3 R84.2
!RST7: JP29.3 R96.2
!RST8: JP33.3 R108.2
!RST9: JP37.3 R120.2
!RST10: JP41.3 R132.2
!RST11: JP45.3 R144.2
!RST12: JP49.3 R156.2
!RST13: JP53.3 R168.2
!RST14: JP57.3 R180.2
!RST-L: R1.1 R12.1 U1.5
!RST-L1: R13.1 R24.1 U2.5
!RST-L2: R25.1 R36.1 U7.5
!RST-L3: R37.1 R48.1 U10.5
!RST-L4: R49.1 R60.1 U13.5
!RST-L5: R61.1 R72.1 U16.5
!RST-L6: R73.1 R84.1 U19.5
!RST-L7: R85.1 R96.1 U22.5
!RST-L8: R97.1 R108.1 U25.5
!RST-L9: R109.1 R120.1 U28.5
!RST-L10: R121.1 R132.1 U31.5
!RST-L11: R133.1 R144.1 U34.5
!RST-L12: R145.1 R156.1 U37.5
!RST-L13: R157.1 R168.1 U40.5
!RST-L14: R169.1 R180.1 U43.5
!SEN: JP1.4 R11.2
!SEN1: JP2.4 R23.2
!SEN2: JP9.4 R35.2
!SEN3: JP13.4 R47.2
!SEN4: JP17.4 R59.2
!SEN5: JP21.4 R71.2
!SEN6: JP25.4 R83.2
!SEN7: JP29.4 R95.2
!SEN8: JP33.4 R107.2
!SEN9: JP37.4 R119.2
!SEN10: JP41.4 R131.2
!SEN11: JP45.4 R143.2
!SEN12: JP49.4 R155.2
!SEN13: JP53.4 R167.2
!SEN14: JP57.4 R179.2
!SEN-L: R2.1 R11.1 U1.6
!SEN-L1: R14.1 R23.1 U2.6
!SEN-L2: R26.1 R35.1 U7.6
!SEN-L3: R38.1 R47.1 U10.6
!SEN-L4: R50.1 R59.1 U13.6
!SEN-L5: R62.1 R71.1 U16.6
!SEN-L6: R74.1 R83.1 U19.6
!SEN-L7: R86.1 R95.1 U22.6
!SEN-L8: R98.1 R107.1 U25.6
!SEN-L9: R110.1 R119.1 U28.6
!SEN-L10: R122.1 R131.1 U31.6
!SEN-L11: R134.1 R143.1 U34.6
!SEN-L12: R146.1 R155.1 U37.6
!SEN-L13: R158.1 R167.1 U40.6
!SEN-L14: R170.1 R179.1 U43.6
ANT: C5.1 U1.2
ANT1: C16.1 U2.2
ANT2: C27.1 U7.2
ANT3: C38.1 U10.2
ANT4: C49.1 U13.2
ANT5: C60.1 U16.2
ANT6: C71.1 U19.2
ANT7: C82.1 U22.2
ANT8: C93.1 U25.2
ANT9: C104.1 U28.2
ANT10: C115.1 U31.2
ANT11: C126.1 U34.2
ANT12: C137.1 U37.2
ANT13: C148.1 U40.2
ANT14: C159.1 U43.2
GND: C1.2 C2.2 C3.1 C4.1 C6.1 C9.2 JP1.8 L1.2 R1.2 U1.3 U1.4 U1.12 U1.15 U1.21 U3.4 U3.5
GND1: C12.2 C13.2 C14.1 C15.1 C17.1 C18.2 JP2.8 L4.2 R13.2 U2.3 U2.4 U2.12 U2.15 U2.21 U5.4 U5.5
GND2: C23.2 C24.2 C25.1 C26.1 C28.1 C29.2 JP9.8 L7.2 R25.2 U7.3 U7.4 U7.12 U7.15 U7.21 U8.4 U8.5
GND3: C34.2 C35.2 C36.1 C37.1 C39.1 C40.2 JP13.8 L10.2 R37.2 U10.3 U10.4 U10.12 U10.15 U10.21 U11.4 U11.5
GND4: C45.2 C46.2 C47.1 C48.1 C50.1 C51.2 JP17.8 L13.2 R49.2 U13.3 U13.4 U13.12 U13.15 U13.21 U14.4 U14.5
GND5: C56.2 C57.2 C58.1 C59.1 C61.1 C62.2 JP21.8 L16.2 R61.2 U16.3 U16.4 U16.12 U16.15 U16.21 U17.4 U17.5
GND6: C67.2 C68.2 C69.1 C70.1 C72.1 C73.2 JP25.8 L19.2 R73.2 U19.3 U19.4 U19.12 U19.15 U19.21 U20.4 U20.5
GND7: C78.2 C79.2 C80.1 C81.1 C83.1 C84.2 JP29.8 L22.2 R85.2 U22.3 U22.4 U22.12 U22.15 U22.21 U23.4 U23.5
GND8: C89.2 C90.2 C91.1 C92.1 C94.1 C95.2 JP33.8 L25.2 R97.2 U25.3 U25.4 U25.12 U25.15 U25.21 U26.4 U26.5
GND9: C100.2 C101.2 C102.1 C103.1 C105.1 C106.2 JP37.8 L28.2 R109.2 U28.3 U28.4 U28.12 U28.15 U28.21 U29.4 U29.5
GND10: C111.2 C112.2 C113.1 C114.1 C116.1 C117.2 JP41.8 L31.2 R121.2 U31.3 U31.4 U31.12 U31.15 U31.21 U32.4 U32.5
GND11: C122.2 C123.2 C124.1 C125.1 C127.1 C128.2 JP45.8 L34.2 R133.2 U34.3 U34.4 U34.12 U34.15 U34.21 U35.4 U35.5
GND12: C133.2 C134.2 C135.1 C136.1 C138.1 C139.2 JP49.8 L37.2 R145.2 U37.3 U37.4 U37.12 U37.15 U37.21 U38.4 U38.5
GND13: C144.2 C145.2 C146.1 C147.1 C149.1 C150.2 JP53.8 L40.2 R157.2 U40.3 U40.4 U40.12 U40.15 U40.21 U41.4 U41.5
GND14: C155.2 C156.2 C157.1 C158.1 C160.1 C161.2 JP57.8 L43.2 R169.2 U43.3 U43.4 U43.12 U43.15 U43.21 U44.4 U44.5
GPIO1: JP1.2 U1.19
GPIO2: JP1.1 U1.18
GPIO3: JP2.2 U2.19
GPIO4: JP2.1 U2.18
GPIO5: JP9.2 U7.19
GPIO6: JP9.1 U7.18
GPIO7: JP13.2 U10.19
GPIO8: JP13.1 U10.18
GPIO9: JP17.2 U13.19
GPIO10: JP17.1 U13.18
GPIO11: JP21.2 U16.19
GPIO12: JP21.1 U16.18
GPIO13: JP25.2 U19.19
GPIO14: JP25.1 U19.18
GPIO15: JP29.2 U22.19
GPIO16: JP29.1 U22.18
GPIO17: JP33.2 U25.19
GPIO18: JP33.1 U25.18
GPIO19: JP37.2 U28.19
GPIO20: JP37.1 U28.18
GPIO21: JP41.2 U31.19
GPIO22: JP41.1 U31.18
GPIO23: JP45.2 U34.19
GPIO24: JP45.1 U34.18
GPIO25: JP49.2 U37.19
GPIO26: JP49.1 U37.18
GPIO27: JP53.2 U40.19
GPIO28: JP53.1 U40.18
GPIO29: JP57.2 U43.19
GPIO30: JP57.1 U43.18
LA: L2.2 U4.TIP
LA1: L5.2 U6.TIP
LA2: L8.2 U9.TIP
LA3: L11.2 U12.TIP
LA4: L14.2 U15.TIP
LA5: L17.2 U18.TIP
LA6: L20.2 U21.TIP
LA7: L23.2 U24.TIP
LA8: L26.2 U27.TIP
LA9: L29.2 U30.TIP
LA10: L32.2 U33.TIP
LA11: L35.2 U36.TIP
LA12: L38.2 U39.TIP
LA13: L41.2 U42.TIP
LA14: L44.2 U45.TIP
LOUT: C10.1 U1.14
LOUT1: C21.1 U2.14
LOUT2: C32.1 U7.14
LOUT3: C43.1 U10.14
LOUT4: C54.1 U13.14
LOUT5: C65.1 U16.14
LOUT6: C76.1 U19.14
LOUT7: C87.1 U22.14
LOUT8: C98.1 U25.14
LOUT9: C109.1 U28.14
LOUT10: C120.1 U31.14
LOUT11: C131.1 U34.14
LOUT12: C142.1 U37.14
LOUT13: C153.1 U40.14
LOUT14: C164.1 U43.14
N$1: C4.2 U1.9 Y1.X2
N$2: C3.2 U1.17 Y1.X1
N$3: C5.2 L1.1 U4.SLEEVE
N$4: C7.C L2.1
N$5: C7.A R6.1 U3.1
N$6: C8.A R7.1 U3.7
N$7: C8.C L3.1
N$8: C9.1 U3.3
N$9: C15.2 U2.9 Y2.X2
N$10: C14.2 U2.17 Y2.X1
N$11: R4.1 R6.2 U3.2
N$12: R5.1 R7.2 U3.6
N$13: C10.2 R4.2
N$14: C11.2 R5.2
N$15: C16.2 L4.1 U6.SLEEVE
N$16: C19.A R18.1 U5.1
N$17: C20.A R19.1 U5.7
N$18: C18.1 U5.3
N$19: R16.1 R18.2 U5.2
N$20: R17.1 R19.2 U5.6
N$21: C21.2 R16.2
N$22: C22.2 R17.2
N$23: C19.C L5.1
N$24: C20.C L6.1
N$25: C26.2 U7.9 Y3.X2
N$26: C25.2 U7.17 Y3.X1
N$27: C27.2 L7.1 U9.SLEEVE
N$28: C30.A R30.1 U8.1
N$29: C31.A R31.1 U8.7
N$30: C29.1 U8.3
N$31: R28.1 R30.2 U8.2
N$32: R29.1 R31.2 U8.6
N$33: C32.2 R28.2
N$34: C33.2 R29.2
N$35: C30.C L8.1
N$36: C31.C L9.1
N$37: C37.2 U10.9 Y4.X2
N$38: C36.2 U10.17 Y4.X1
N$39: C38.2 L10.1 U12.SLEEVE
N$40: C41.A R42.1 U11.1
N$41: C42.A R43.1 U11.7
N$42: C40.1 U11.3
N$43: R40.1 R42.2 U11.2
N$44: R41.1 R43.2 U11.6
N$45: C43.2 R40.2
N$46: C44.2 R41.2
N$47: C41.C L11.1
N$48: C42.C L12.1
N$49: C48.2 U13.9 Y5.X2
N$50: C47.2 U13.17 Y5.X1
N$51: C49.2 L13.1 U15.SLEEVE
N$52: C52.A R54.1 U14.1
N$53: C53.A R55.1 U14.7
N$54: C51.1 U14.3
N$55: R52.1 R54.2 U14.2
N$56: R53.1 R55.2 U14.6
N$57: C54.2 R52.2
N$58: C55.2 R53.2
N$59: C52.C L14.1
N$60: C53.C L15.1
N$61: C59.2 U16.9 Y6.X2
N$62: C58.2 U16.17 Y6.X1
N$63: C60.2 L16.1 U18.SLEEVE
N$64: C63.A R66.1 U17.1
N$65: C64.A R67.1 U17.7
N$66: C62.1 U17.3
N$67: R64.1 R66.2 U17.2
N$68: R65.1 R67.2 U17.6
N$69: C65.2 R64.2
N$70: C66.2 R65.2
N$71: C63.C L17.1
N$72: C64.C L18.1
N$73: C70.2 U19.9 Y7.X2
N$74: C69.2 U19.17 Y7.X1
N$75: C71.2 L19.1 U21.SLEEVE
N$76: C74.A R78.1 U20.1
N$77: C75.A R79.1 U20.7
N$78: C73.1 U20.3
N$79: R76.1 R78.2 U20.2
N$80: R77.1 R79.2 U20.6
N$81: C76.2 R76.2
N$82: C77.2 R77.2
N$83: C74.C L20.1
N$84: C75.C L21.1
N$85: C81.2 U22.9 Y8.X2
N$86: C80.2 U22.17 Y8.X1
N$87: C82.2 L22.1 U24.SLEEVE
N$88: C85.A R90.1 U23.1
N$89: C86.A R91.1 U23.7
N$90: C84.1 U23.3
N$91: R88.1 R90.2 U23.2
N$92: R89.1 R91.2 U23.6
N$93: C87.2 R88.2
N$94: C88.2 R89.2
N$95: C85.C L23.1
N$96: C86.C L24.1
N$97: C92.2 U25.9 Y9.X2
N$98: C91.2 U25.17 Y9.X1
N$99: C93.2 L25.1 U27.SLEEVE
N$100: C96.A R102.1 U26.1
N$101: C97.A R103.1 U26.7
N$102: C95.1 U26.3
N$103: R100.1 R102.2 U26.2
N$104: R101.1 R103.2 U26.6
N$105: C98.2 R100.2
N$106: C99.2 R101.2
N$107: C96.C L26.1
N$108: C97.C L27.1
N$109: C103.2 U28.9 Y10.X2
N$110: C102.2 U28.17 Y10.X1
N$111: C104.2 L28.1 U30.SLEEVE
N$112: C107.A R114.1 U29.1
N$113: C108.A R115.1 U29.7
N$114: C106.1 U29.3
N$115: R112.1 R114.2 U29.2
N$116: R113.1 R115.2 U29.6
N$117: C109.2 R112.2
N$118: C110.2 R113.2
N$119: C107.C L29.1
N$120: C108.C L30.1
N$121: C114.2 U31.9 Y11.X2
N$122: C113.2 U31.17 Y11.X1
N$123: C115.2 L31.1 U33.SLEEVE
N$124: C118.A R126.1 U32.1
N$125: C119.A R127.1 U32.7
N$126: C117.1 U32.3
N$127: R124.1 R126.2 U32.2
N$128: R125.1 R127.2 U32.6
N$129: C120.2 R124.2
N$130: C121.2 R125.2
N$131: C118.C L32.1
N$132: C119.C L33.1
N$133: C125.2 U34.9 Y12.X2
N$134: C124.2 U34.17 Y12.X1
N$135: C126.2 L34.1 U36.SLEEVE
N$136: C129.A R138.1 U35.1
N$137: C130.A R139.1 U35.7
N$138: C128.1 U35.3
N$139: R136.1 R138.2 U35.2
N$140: R137.1 R139.2 U35.6
N$141: C131.2 R136.2
N$142: C132.2 R137.2
N$143: C129.C L35.1
N$144: C130.C L36.1
N$145: C136.2 U37.9 Y13.X2
N$146: C135.2 U37.17 Y13.X1
N$147: C137.2 L37.1 U39.SLEEVE
N$148: C140.A R150.1 U38.1
N$149: C141.A R151.1 U38.7
N$150: C139.1 U38.3
N$151: R148.1 R150.2 U38.2
N$152: R149.1 R151.2 U38.6
N$153: C142.2 R148.2
N$154: C143.2 R149.2
N$155: C140.C L38.1
N$156: C141.C L39.1
N$157: C147.2 U40.9 Y14.X2
N$158: C146.2 U40.17 Y14.X1
N$159: C148.2 L40.1 U42.SLEEVE
N$160: C151.A R162.1 U41.1
N$161: C152.A R163.1 U41.7
N$162: C150.1 U41.3
N$163: R160.1 R162.2 U41.2
N$164: R161.1 R163.2 U41.6
N$165: C153.2 R160.2
N$166: C154.2 R161.2
N$167: C151.C L41.1
N$168: C152.C L42.1
N$169: C158.2 U43.9 Y15.X2
N$170: C157.2 U43.17 Y15.X1
N$171: C159.2 L43.1 U45.SLEEVE
N$172: C162.A R174.1 U44.1
N$173: C163.A R175.1 U44.7
N$174: C161.1 U44.3
N$175: R172.1 R174.2 U44.2
N$176: R173.1 R175.2 U44.6
N$177: C164.2 R172.2
N$178: C165.2 R173.2
N$179: C162.C L44.1
N$180: C163.C L45.1
RA: L3.2 U4.RING
RA1: L6.2 U6.RING
RA2: L9.2 U9.RING
RA3: L12.2 U12.RING
RA4: L15.2 U15.RING
RA5: L18.2 U18.RING
RA6: L21.2 U21.RING
RA7: L24.2 U24.RING
RA8: L27.2 U27.RING
RA9: L30.2 U30.RING
RA10: L33.2 U33.RING
RA11: L36.2 U36.RING
RA12: L39.2 U39.RING
RA13: L42.2 U42.RING
RA14: L45.2 U45.RING
ROUT: C11.1 U1.13
ROUT1: C22.1 U2.13
ROUT2: C33.1 U7.13
ROUT3: C44.1 U10.13
ROUT4: C55.1 U13.13
ROUT5: C66.1 U16.13
ROUT6: C77.1 U19.13
ROUT7: C88.1 U22.13
ROUT8: C99.1 U25.13
ROUT9: C110.1 U28.13
ROUT10: C121.1 U31.13
ROUT11: C132.1 U34.13
ROUT12: C143.1 U37.13
ROUT13: C154.1 U40.13
ROUT14: C165.1 U43.13
SCLK: JP1.5 R10.2
SCLK1: JP2.5 R22.2
SCLK2: JP9.5 R34.2
SCLK3: JP13.5 R46.2
SCLK4: JP17.5 R58.2
SCLK5: JP21.5 R70.2
SCLK6: JP25.5 R82.2
SCLK7: JP29.5 R94.2
SCLK8: JP33.5 R106.2
SCLK9: JP37.5 R118.2
SCLK10: JP41.5 R130.2
SCLK11: JP45.5 R142.2
SCLK12: JP49.5 R154.2
SCLK13: JP53.5 R166.2
SCLK14: JP57.5 R178.2
SCLK-L: R3.1 R10.1 U1.7
SCLK-L1: R15.1 R22.1 U2.7
SCLK-L2: R27.1 R34.1 U7.7
SCLK-L3: R39.1 R46.1 U10.7
SCLK-L4: R51.1 R58.1 U13.7
SCLK-L5: R63.1 R70.1 U16.7
SCLK-L6: R75.1 R82.1 U19.7
SCLK-L7: R87.1 R94.1 U22.7
SCLK-L8: R99.1 R106.1 U25.7
SCLK-L9: R111.1 R118.1 U28.7
SCLK-L10: R123.1 R130.1 U31.7
SCLK-L11: R135.1 R142.1 U34.7
SCLK-L12: R147.1 R154.1 U37.7
SCLK-L13: R159.1 R166.1 U40.7
SCLK-L14: R171.1 R178.1 U43.7
SDIO: JP1.6 R9.2
SDIO1: JP2.6 R21.2
SDIO2: JP9.6 R33.2
SDIO3: JP13.6 R45.2
SDIO4: JP17.6 R57.2
SDIO5: JP21.6 R69.2
SDIO6: JP25.6 R81.2
SDIO7: JP29.6 R93.2
SDIO8: JP33.6 R105.2
SDIO9: JP37.6 R117.2
SDIO10: JP41.6 R129.2
SDIO11: JP45.6 R141.2
SDIO12: JP49.6 R153.2
SDIO13: JP53.6 R165.2
SDIO14: JP57.6 R177.2
SDIO-L: R8.1 R9.1 U1.8
SDIO-L1: R20.1 R21.1 U2.8
SDIO-L2: R32.1 R33.1 U7.8
SDIO-L3: R44.1 R45.1 U10.8
SDIO-L4: R56.1 R57.1 U13.8
SDIO-L5: R68.1 R69.1 U16.8
SDIO-L6: R80.1 R81.1 U19.8
SDIO-L7: R92.1 R93.1 U22.8
SDIO-L8: R104.1 R105.1 U25.8
SDIO-L9: R116.1 R117.1 U28.8
SDIO-L10: R128.1 R129.1 U31.8
SDIO-L11: R140.1 R141.1 U34.8
SDIO-L12: R152.1 R153.1 U37.8
SDIO-L13: R164.1 R165.1 U40.8
SDIO-L14: R176.1 R177.1 U43.8

## Tracks (layer width: path | path; a pad name or v marks a point on that pad's centre or on a via)
3.3V  (via drill 0.51)
  Top 0.203: U1.16 12.96,18.28 11.94,19.3 11.94,19.94 | R3.2 R2.2 17.87,12.36 v17.02,13.21 | U1.10 16.41,17.77 16.73,18.09 16.73,18.29 | U1.11 16.72,18.28 16.73,18.29 | 16.73,18.29 16.73,21.17 v17.02,21.46 18.29,21.46 18.92,20.83 C1.1 | v22.71,30.98 v22.72,30.99 23.93,30.99 23.93,31.17 U3.8 24,32.26 23.37,32.89 C6.2 | 11.94,19.94 v11.94,20.83 | C2.1 11.9,19.98 11.94,19.94
  Top 0.254: R8.2 26.29,11.94 26.8,11.43 26.8,10.29 JP1.7
  Bottom 0.203: v17.02,13.21 13.21,13.21 9.91,16.51 9.91,20.07 10.67,20.83 v11.94,20.83 12.83,21.72 14.86,21.72 15.11,21.46 v17.02,21.46 21.46,21.46 22.71,22.71 v22.71,30.98
  Bottom 0.254: v17.02,13.21 23.37,13.21 24.64,11.94 JP1.7
3.3V1  (via drill 0.51)
  Top 0.203: U2.16 36.33,18.28 35.31,19.3 35.31,19.94 | R15.2 R14.2 41.24,12.36 v40.39,13.21 | U2.10 39.77,17.77 40.09,18.09 40.09,18.29 | U2.11 40.09,18.28 40.09,18.29 | 40.09,18.29 40.09,21.17 v40.39,21.46 41.66,21.46 42.29,20.83 C12.1 | v46.08,30.98 46.09,30.99 47.3,30.99 47.3,31.17 U5.8 47.37,32.26 46.74,32.89 C17.2 | 35.31,19.94 v35.31,20.83 | C13.1 35.27,19.98 35.31,19.94
  Top 0.254: R20.2 49.66,11.94 50.16,11.43 50.16,10.29 JP2.7
  Bottom 0.203: v40.39,13.21 36.58,13.21 33.27,16.51 33.27,20.07 34.04,20.83 v35.31,20.83 36.2,21.72 38.23,21.72 38.48,21.46 v40.39,21.46 44.83,21.46 46.08,22.71 v46.08,30.98
  Bottom 0.254: v40.39,13.21 46.74,13.21 48.01,11.94 JP2.7
3.3V2  (via drill 0.51)
  Top 0.203: U7.16 59.7,18.28 58.67,19.3 58.67,19.94 | R27.2 R26.2 64.6,12.36 v63.75,13.21 | U7.10 63.14,17.77 63.46,18.09 63.46,18.29 | U7.11 63.46,18.28 63.46,18.29 | 63.46,18.29 63.46,21.17 v63.75,21.46 65.02,21.46 65.66,20.83 C23.1 | v69.45,30.98 v69.46,30.99 70.66,30.99 70.66,31.17 U8.8 70.74,32.26 70.1,32.89 C28.2 | 58.67,19.94 v58.67,20.83 | C24.1 58.63,19.98 58.67,19.94
  Top 0.254: R32.2 73.03,11.94 73.53,11.43 73.53,10.29 JP9.7
  Bottom 0.203: v63.75,13.21 59.94,13.21 56.64,16.51 56.64,20.07 57.4,20.83 v58.67,20.83 59.56,21.72 61.59,21.72 61.85,21.46 v63.75,21.46 68.2,21.46 69.45,22.71 v69.45,30.98
  Bottom 0.254: v63.75,13.21 70.1,13.21 71.37,11.94 JP9.7
3.3V3  (via drill 0.51)
  Top 0.203: U10.16 83.06,18.28 82.04,19.3 82.04,19.94 | R39.2 R38.2 87.97,12.36 v87.12,13.21 | U10.10 86.51,17.77 86.83,18.09 86.83,18.29 | U10.11 86.83,18.28 86.83,18.29 | 86.83,18.29 86.83,21.17 v87.12,21.46 88.39,21.46 89.03,20.83 C34.1 | v92.82,30.98 v92.83,30.99 94.03,30.99 94.03,31.17 U11.8 94.11,32.26 93.47,32.89 C39.2 | 82.04,19.94 v82.04,20.83 | C35.1 82,19.98 82.04,19.94
  Top 0.254: R44.2 96.39,11.94 96.9,11.43 96.9,10.29 JP13.7
  Bottom 0.203: v87.12,13.21 83.31,13.21 80.01,16.51 80.01,20.07 80.77,20.83 v82.04,20.83 82.93,21.72 84.96,21.72 85.22,21.46 v87.12,21.46 91.57,21.46 92.82,22.71 v92.82,30.98
  Bottom 0.254: v87.12,13.21 93.47,13.21 94.74,11.94 JP13.7
3.3V4  (via drill 0.51)
  Top 0.203: U13.16 106.43,18.28 105.41,19.3 105.41,19.94 | R51.2 R50.2 111.34,12.36 v110.49,13.21 | U13.10 109.88,17.77 110.2,18.09 110.2,18.29 | U13.11 110.19,18.28 110.2,18.29 | 110.2,18.29 110.2,21.17 v110.49,21.46 111.76,21.46 112.39,20.83 C45.1 | v116.19,30.98 v116.19,30.99 117.4,30.99 117.4,31.17 U14.8 117.47,32.26 116.84,32.89 C50.2 | 105.41,19.94 v105.41,20.83 | C46.1 105.37,19.98 105.41,19.94
  Top 0.254: R56.2 119.76,11.94 120.27,11.43 120.27,10.29 JP17.7
  Bottom 0.203: v110.49,13.21 106.68,13.21 103.38,16.51 103.38,20.07 104.14,20.83 v105.41,20.83 106.3,21.72 108.33,21.72 108.58,21.46 v110.49,21.46 114.94,21.46 116.19,22.71 v116.19,30.98
  Bottom 0.254: v110.49,13.21 116.84,13.21 118.11,11.94 JP17.7
3.3V5  (via drill 0.51)
  Top 0.203: U16.16 12.96,53.84 11.94,54.86 11.94,55.5 | R63.2 R62.2 17.87,47.92 v17.02,48.77 | U16.10 16.41,53.33 16.73,53.65 16.73,53.85 | U16.11 16.72,53.84 16.73,53.85 | 16.73,53.85 16.73,56.73 v17.02,57.02 18.29,57.02 18.92,56.39 C56.1 | v22.71,66.54 v22.72,66.55 23.93,66.55 23.93,66.73 U17.8 24,67.82 23.37,68.45 C61.2 | 11.94,55.5 v11.94,56.39 | C57.1 11.9,55.54 11.94,55.5
  Top 0.254: R68.2 26.29,47.5 26.8,46.99 26.8,45.85 JP21.7
  Bottom 0.203: v17.02,48.77 13.21,48.77 9.91,52.07 9.91,55.63 10.67,56.39 v11.94,56.39 12.83,57.28 14.86,57.28 15.11,57.02 v17.02,57.02 21.46,57.02 22.71,58.27 v22.71,66.54
  Bottom 0.254: v17.02,48.77 23.37,48.77 24.64,47.5 JP21.7
3.3V6  (via drill 0.51)
  Top 0.203: U19.16 36.33,53.84 35.31,54.86 35.31,55.5 | R75.2 R74.2 41.24,47.92 v40.39,48.77 | U19.10 39.77,53.33 40.09,53.65 40.09,53.85 | U19.11 40.09,53.84 40.09,53.85 | 40.09,53.85 40.09,56.73 v40.39,57.02 41.66,57.02 42.29,56.39 C67.1 | v46.08,66.54 46.09,66.55 47.3,66.55 47.3,66.73 U20.8 47.37,67.82 46.74,68.45 C72.2 | 35.31,55.5 v35.31,56.39 | C68.1 35.27,55.54 35.31,55.5
  Top 0.254: R80.2 49.66,47.5 50.16,46.99 50.16,45.85 JP25.7
  Bottom 0.203: v40.39,48.77 36.58,48.77 33.27,52.07 33.27,55.63 34.04,56.39 v35.31,56.39 36.2,57.28 38.23,57.28 38.48,57.02 v40.39,57.02 44.83,57.02 46.08,58.27 v46.08,66.54
  Bottom 0.254: v40.39,48.77 46.74,48.77 48.01,47.5 JP25.7
3.3V7  (via drill 0.51)
  Top 0.203: U22.16 59.7,53.84 58.67,54.86 58.67,55.5 | R87.2 R86.2 64.6,47.92 v63.75,48.77 | U22.10 63.14,53.33 63.46,53.65 63.46,53.85 | U22.11 63.46,53.84 63.46,53.85 | 63.46,53.85 63.46,56.73 v63.75,57.02 65.02,57.02 65.66,56.39 C78.1 | v69.45,66.54 v69.46,66.55 70.66,66.55 70.66,66.73 U23.8 70.74,67.82 70.1,68.45 C83.2 | 58.67,55.5 v58.67,56.39 | C79.1 58.63,55.54 58.67,55.5
  Top 0.254: R92.2 73.03,47.5 73.53,46.99 73.53,45.85 JP29.7
  Bottom 0.203: v63.75,48.77 59.94,48.77 56.64,52.07 56.64,55.63 57.4,56.39 v58.67,56.39 59.56,57.28 61.59,57.28 61.85,57.02 v63.75,57.02 68.2,57.02 69.45,58.27 v69.45,66.54
  Bottom 0.254: v63.75,48.77 70.1,48.77 71.37,47.5 JP29.7
3.3V8  (via drill 0.51)
  Top 0.203: U25.16 83.06,53.84 82.04,54.86 82.04,55.5 | R99.2 R98.2 87.97,47.92 v87.12,48.77 | U25.10 86.51,53.33 86.83,53.65 86.83,53.85 | U25.11 86.83,53.84 86.83,53.85 | 86.83,53.85 86.83,56.73 v87.12,57.02 88.39,57.02 89.03,56.39 C89.1 | v92.82,66.54 v92.83,66.55 94.03,66.55 94.03,66.73 U26.8 94.11,67.82 93.47,68.45 C94.2 | 82.04,55.5 v82.04,56.39 | C90.1 82,55.54 82.04,55.5
  Top 0.254: R104.2 96.39,47.5 96.9,46.99 96.9,45.85 JP33.7
  Bottom 0.203: v87.12,48.77 83.31,48.77 80.01,52.07 80.01,55.63 80.77,56.39 v82.04,56.39 82.93,57.28 84.96,57.28 85.22,57.02 v87.12,57.02 91.57,57.02 92.82,58.27 v92.82,66.54
  Bottom 0.254: v87.12,48.77 93.47,48.77 94.74,47.5 JP33.7
3.3V9  (via drill 0.51)
  Top 0.203: U28.16 106.43,53.84 105.41,54.86 105.41,55.5 | R111.2 R110.2 111.34,47.92 v110.49,48.77 | U28.10 109.88,53.33 110.2,53.65 110.2,53.85 | U28.11 110.19,53.84 110.2,53.85 | 110.2,53.85 110.2,56.73 v110.49,57.02 111.76,57.02 112.39,56.39 C100.1 | v116.19,66.54 v116.19,66.55 117.4,66.55 117.4,66.73 U29.8 117.47,67.82 116.84,68.45 C105.2 | 105.41,55.5 v105.41,56.39 | C101.1 105.37,55.54 105.41,55.5
  Top 0.254: R116.2 119.76,47.5 120.27,46.99 120.27,45.85 JP37.7
  Bottom 0.203: v110.49,48.77 106.68,48.77 103.38,52.07 103.38,55.63 104.14,56.39 v105.41,56.39 106.3,57.28 108.33,57.28 108.58,57.02 v110.49,57.02 114.94,57.02 116.19,58.27 v116.19,66.54
  Bottom 0.254: v110.49,48.77 116.84,48.77 118.11,47.5 JP37.7
3.3V10  (via drill 0.51)
  Top 0.203: U31.16 12.96,89.4 11.94,90.42 11.94,91.06 | R123.2 R122.2 17.87,83.48 v17.02,84.33 | U31.10 16.41,88.89 16.73,89.21 16.73,89.41 | U31.11 16.72,89.4 16.73,89.41 | 16.73,89.41 16.73,92.29 v17.02,92.58 18.29,92.58 18.92,91.95 C111.1 | v22.71,102.1 v22.72,102.11 23.93,102.11 23.93,102.29 U32.8 24,103.38 23.37,104.01 C116.2 | 11.94,91.06 v11.94,91.95 | C112.1 11.9,91.1 11.94,91.06
  Top 0.254: R128.2 26.29,83.06 26.8,82.55 26.8,81.41 JP41.7
  Bottom 0.203: v17.02,84.33 13.21,84.33 9.91,87.63 9.91,91.19 10.67,91.95 v11.94,91.95 12.83,92.84 14.86,92.84 15.11,92.58 v17.02,92.58 21.46,92.58 22.71,93.83 v22.71,102.1
  Bottom 0.254: v17.02,84.33 23.37,84.33 24.64,83.06 JP41.7
3.3V11  (via drill 0.51)
  Top 0.203: U34.16 36.33,89.4 35.31,90.42 35.31,91.06 | R135.2 R134.2 41.24,83.48 v40.39,84.33 | U34.10 39.77,88.89 40.09,89.21 40.09,89.41 | U34.11 40.09,89.4 40.09,89.41 | 40.09,89.41 40.09,92.29 v40.39,92.58 41.66,92.58 42.29,91.95 C122.1 | v46.08,102.1 46.09,102.11 47.3,102.11 47.3,102.29 U35.8 47.37,103.38 46.74,104.01 C127.2 | 35.31,91.06 v35.31,91.95 | C123.1 35.27,91.1 35.31,91.06
  Top 0.254: R140.2 49.66,83.06 50.16,82.55 50.16,81.41 JP45.7
  Bottom 0.203: v40.39,84.33 36.58,84.33 33.27,87.63 33.27,91.19 34.04,91.95 v35.31,91.95 36.2,92.84 38.23,92.84 38.48,92.58 v40.39,92.58 44.83,92.58 46.08,93.83 v46.08,102.1
  Bottom 0.254: v40.39,84.33 46.74,84.33 48.01,83.06 JP45.7
3.3V12  (via drill 0.51)
  Top 0.203: U37.16 59.7,89.4 58.67,90.42 58.67,91.06 | R147.2 R146.2 64.6,83.48 v63.75,84.33 | U37.10 63.14,88.89 63.46,89.21 63.46,89.41 | U37.11 63.46,89.4 63.46,89.41 | 63.46,89.41 63.46,92.29 v63.75,92.58 65.02,92.58 65.66,91.95 C133.1 | v69.45,102.1 v69.46,102.11 70.66,102.11 70.66,102.29 U38.8 70.74,103.38 70.1,104.01 C138.2 | 58.67,91.06 v58.67,91.95 | C134.1 58.63,91.1 58.67,91.06
  Top 0.254: R152.2 73.03,83.06 73.53,82.55 73.53,81.41 JP49.7
  Bottom 0.203: v63.75,84.33 59.94,84.33 56.64,87.63 56.64,91.19 57.4,91.95 v58.67,91.95 59.56,92.84 61.59,92.84 61.85,92.58 v63.75,92.58 68.2,92.58 69.45,93.83 v69.45,102.1
  Bottom 0.254: v63.75,84.33 70.1,84.33 71.37,83.06 JP49.7
3.3V13  (via drill 0.51)